# Altium PCB PCB2.PcbDoc
Units mil, origin at the board's own origin, x right, y up, seen from the top; angles counter-clockwise.
Board outline 1610 x 4670 mil, 2 copper layers (Top Layer, Bottom Layer); 14 components, 20 nets, 148 pads, 0 vias.
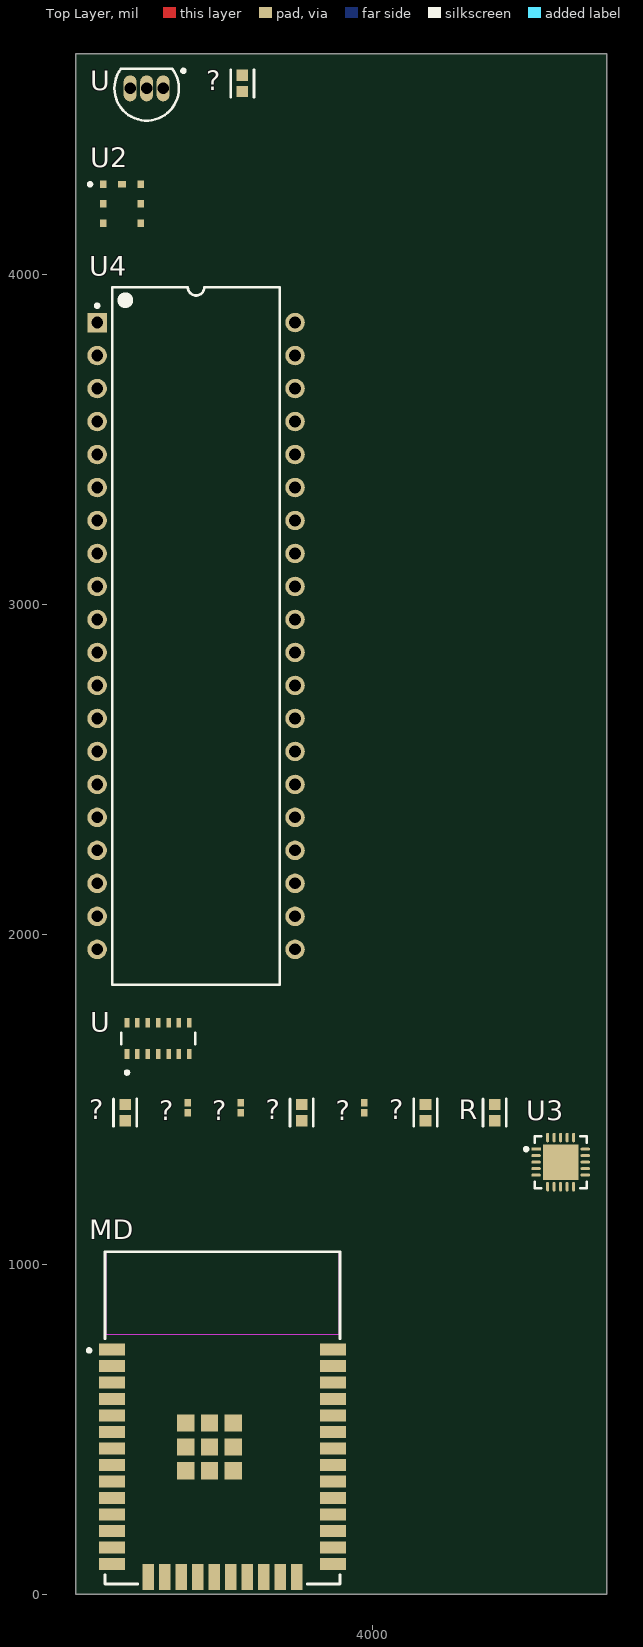
[diagram p0: Top Layer view]
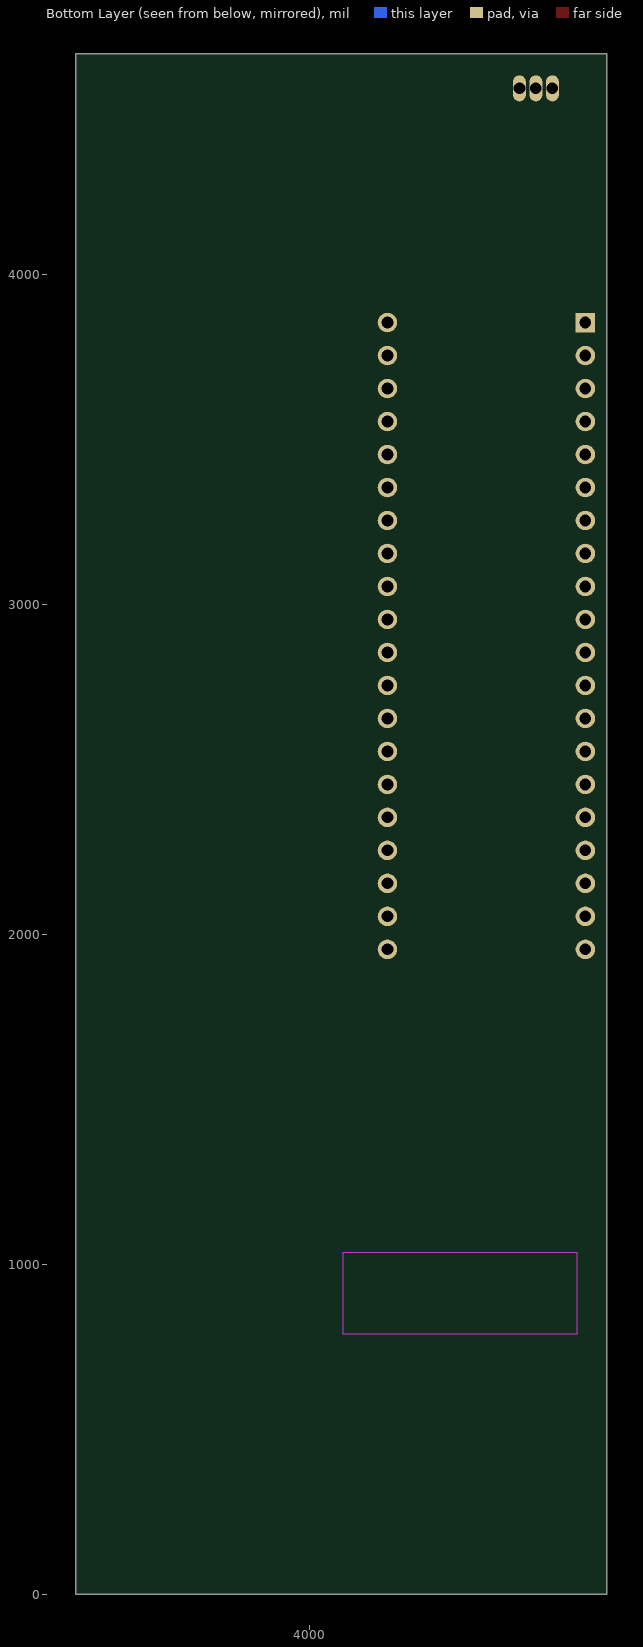
[diagram p1: Bottom Layer view, seen from below]

## Layer stack, top to bottom
Top Solder: solder mask 0.4, Solder Resist, Dk 3.5
Top Layer: signal copper 1.4
Dielectric 1: dielectric 12.6, FR-4, Dk 4.8
Bottom Layer: signal copper 1.4
Bottom Solder: solder mask 0.4, Solder Resist, Dk 3.5

## Board outline
3100,0 4710,0 4710,4670 3100,4670

## Design rules (kind name [scope] priority, off if disabled: settings)
Clearance [All] p1: gap=10 ignorepadtopadclearanceinfootprint=FALSE except(0: Arc-Hole Track-Hole SMDPad-Hole THPad-Hole Via-Hole Fill-Hole Poly-Hole Region-Hole Text-Hole)
PolygonConnect [All] p1: connectstyle=Relief reliefconductorwidth=10 reliefentries=4 polygonreliefangle="90 Angle" airgapwidth=10
RoomDefinition U_temp [InComponentClass('U_temp')] p1: confinementstyle=ConfineIn formatcopy=TRUE lockcomponents=FALSE outline 3125,1405 4205,1405 4205,4635 3125,4635
RoomDefinition U_pressiion [InComponentClass('U_pressiion')] p2: confinementstyle=ConfineIn formatcopy=TRUE lockcomponents=FALSE outline 3125,4125 3325,4125 3325,4405 3125,4405
RoomDefinition U_lcd [InComponentClass('U_lcd')] p3: confinementstyle=ConfineIn formatcopy=TRUE lockcomponents=FALSE outline 3125,1835 3805,1835 3805,4075 3125,4075
RoomDefinition U_heart_rate [InComponentClass('U_heart_rate')] p4: confinementstyle=ConfineIn formatcopy=TRUE lockcomponents=FALSE outline 3125,1565 3495,1565 3495,4635 3125,4635
RoomDefinition U_ecg [InComponentClass('U_ecg')] p5: confinementstyle=ConfineIn formatcopy=TRUE lockcomponents=FALSE outline 3125,1205 4675,1205 4675,4635 3125,4635
RoomDefinition ESP [InComponentClass('ESP')] p6: confinementstyle=ConfineIn formatcopy=TRUE lockcomponents=FALSE outline 3125,0 3935,0 3935,1155 3125,1155
RoutingVias [All] p1: holewidth=28 width=50 viastyle="Through Hole" minholewidth=28 minwidth=50 maxholewidth=28 maxwidth=50
SolderMaskExpansion [All] p1: expansion=4 istentingtop=FALSE
Width [All] p1: maxlimit=10 minlimit=10 preferedwidth=10
30 further rules are at their usual default settings.

## Components (designator, comment, footprint, x,y, rotation, side; value= is the part's Value field where it differs from the comment)
? "ERA3AEB302V" FP-ERA3A-IPC_C 3785,1460 r90 top
? "C0402C104K4RACTU" CAPC1005X55X30LL05T10 3975,1475 r90 top
? "C0402C104K4RACTU" CAPC1005X55X30LL05T10 3600,1475 r90 top
? "C0402C104K4RACTU" CAPC1005X55X30LL05T10 3440,1475 r90 top
? "ERA3AEB302V" FP-ERA3A-IPC_C 3250,1460 r90 top
? "ERA3AEB302V" FP-ERA3A-IPC_C 4160,1460 r90 top
? "ERA3AEB302V" FP-ERA3A-IPC_C 3605,4580 r90 top
MD "ESP32-WROOM-32D" FP-ESP32-WROOM-32D-MFG 3545,535 r0 top
R "ERA3AEB302V" FP-ERA3A-IPC_C 4370,1460 r90 top
U "MAX30102EFD+" FP-F143A5-1-MFG 3350,1685 r90 top
U "DS18B20+" Q3+1 3315,4565 r90 top
U2 "BMP180" BOSC-BMP180-7_V 3240,4215 r0 top
U3 "AD8232ACPZ-R7" FP-CP-20-8-IPC_C 4570,1310 r0 top
U4 "AY0438-I/P" PDIP600-P40 3465,2905 r0 top

## Footprints (in the part's own frame and the unit in brackets; to place one, negate y for a bottom-side part, rotate by r counter-clockwise, add the part's x,y. Pads: shape width x height; smd on the part's side, far side on the other; paste and mask are expansions set on the pad)
BOSC-BMP180-7_V [mm] "LGA, 7-Leads, Body 3.9x3.8mm, Pitch 1.5mm"
  rect 0.5x0.6 smd: 1(-1.45,1.5) 2(-1.45,0) 3(-1.45,-1.5) 4(1.45,-1.5) 5(1.45,0) 6(1.45,1.5)
  rect 0.6x0.5 smd: 7(0,1.5)
  silkscreen extent -2.57,1.38 -2.32,1.62, body extent -1.85,-1.95 1.85,1.95, height 1
CAPC1005X55X30LL05T10 [mm] "Chip Capacitor, 2-Leads, Body 1.00x0.50mm, IPC High Density"
  rect 0.56x0.52 smd: 1(-0.38,0) 2(0.38,0)
  body extent -0.53,-0.28 0.53,0.28, height 0.55
FP-CP-20-8-IPC_C [mm]
  rect 0.731x0.239 smd paste+0 mask+0: 1(-1.891,1)
  rrect100% 0.731x0.239 smd paste+0 mask+0: 2(-1.891,0.5) 3(-1.891,0) 4(-1.891,-0.5) 5(-1.891,-1) 11(1.891,-1) 12(1.891,-0.5) 13(1.891,0) 14(1.891,0.5) 15(1.891,1)
  rrect100% 0.239x0.731 smd paste+0 mask+0: 6(-1,-1.891) 7(-0.5,-1.891) 8(0,-1.891) 9(0.5,-1.891) 10(1,-1.891) 16(1,1.891) 17(0.5,1.891) 18(0,1.891) 19(-0.5,1.891) 20(-1,1.891)
  rect 2.75x2.75 smd paste-1000 mask+0: 21(0,0)
  silkscreen extent -2.78,-2 2,2, body extent -2.36,-2.36 2.36,2.36, height 0.25
FP-ERA3A-IPC_C [mil]
  rect 33.66x35.68 smd paste+0 mask+0: 1(-24.63,0) 2(24.63,0)
  silkscreen extent -41,-35 41,35, body extent -45,-24 45,24, height 10
FP-ESP32-WROOM-32D-MFG [mm]
  rect 2x0.9 smd paste+0 mask+0: 1(-8.5,5.26) 2(-8.5,3.99) 3(-8.5,2.72) 4(-8.5,1.45) 5(-8.5,0.18) 6(-8.5,-1.09) 7(-8.5,-2.36) 8(-8.5,-3.63) 9(-8.5,-4.9) 10(-8.5,-6.17) 11(-8.5,-7.44) 12(-8.5,-8.71) 13(-8.5,-9.98) 14(-8.5,-11.25) 25(8.5,-11.25) 26(8.5,-9.98) 27(8.5,-8.71) 28(8.5,-7.44) 29(8.5,-6.17) 30(8.5,-4.9) 31(8.5,-3.63) 32(8.5,-2.36) 33(8.5,-1.09) 34(8.5,0.18) 35(8.5,1.45) 36(8.5,2.72) 37(8.5,3.99) 38(8.5,5.26)
  rect 0.9x2 smd paste+0 mask+0: 15(-5.715,-12.25) 16(-4.445,-12.25) 17(-3.175,-12.25) 18(-1.905,-12.25) 19(-0.635,-12.25) 20(0.635,-12.25) 21(1.905,-12.25) 22(3.175,-12.25) 23(4.445,-12.25) 24(5.715,-12.25)
  rect 1.33x1.33 smd paste+0 mask+0: 39(-2.835,-4.075) 39(-2.835,-2.24) 39(-2.835,-0.405) 39(-1,-4.075) 39(-1,-2.24) 39(-1,-0.405) 39(0.835,-4.075) 39(0.835,-2.24) 39(0.835,-0.405)
  Keep-Out Layer region: -9,6.45 9,6.45 9,12.75 -9,12.75
  Keep-Out Layer region: -9,6.45 9,6.45 9,12.75 -9,12.75
  silkscreen extent -10.4,-12.8 9.05,12.8, body extent -9.6,-13.35 9.6,12.9, height 0.25
FP-F143A5-1-MFG [mm]
  rect 0.75x0.35 smd paste+0 mask+0: 1(-1.2,2.4) 2(-1.2,1.6) 3(-1.2,0.8) 4(-1.2,0) 5(-1.2,-0.8) 6(-1.2,-1.6) 7(-1.2,-2.4) 8(1.2,-2.4) 9(1.2,-1.6) 10(1.2,-0.8) 11(1.2,0) 12(1.2,0.8) 13(1.2,1.6) 14(1.2,2.4)
  silkscreen extent -2.75,-2.85 0.45,2.85, body extent -2.2,-3.35 2.2,3.35, height 0.25
PDIP600-P40 [mm] "DIP, 40-Pin, Row Spacing 15.24 mm, Pitch 2.54 mm"
  rect 1.5x1.5 hole 0.9: 1(-7.62,24.13)
  round 1.5 hole 0.9: 2(-7.62,21.59) 3(-7.62,19.05) 4(-7.62,16.51) 5(-7.62,13.97) 6(-7.62,11.43) 7(-7.62,8.89) 8(-7.62,6.35) 9(-7.62,3.81) 10(-7.62,1.27) 11(-7.62,-1.27) 12(-7.62,-3.81) 13(-7.62,-6.35) 14(-7.62,-8.89) 15(-7.62,-11.43) 16(-7.62,-13.97) 17(-7.62,-16.51) 18(-7.62,-19.05) 19(-7.62,-21.59) 20(-7.62,-24.13) 21(7.62,-24.13) 22(7.62,-21.59) 23(7.62,-19.05) 24(7.62,-16.51) 25(7.62,-13.97) 26(7.62,-11.43) 27(7.62,-8.89) 28(7.62,-6.35) 29(7.62,-3.81) 30(7.62,-1.27) 31(7.62,1.27) 32(7.62,3.81) 33(7.62,6.35) 34(7.62,8.89) 35(7.62,11.43) 36(7.62,13.97) 37(7.62,16.51) 38(7.62,19.05) 39(7.62,21.59) 40(7.62,24.13)
  silkscreen extent -7.74,-26.85 6.45,26.85, body extent -7.3,-26.85 7.3,26.85, height 6.35
Q3+1 [mm] "TO, Flat Index; 3 In-Line, Axial Leads; Body Dia. 4.7mm; Leads 0.56 x 0.51 mm (max)"
  oval 2x1 hole 0.9: 1(0,-1.27) 2(0,0) 3(0,1.27)
  silkscreen extent -2.48,-2.96 1.5,2.48, body extent -2.48,-2.5 1.5,2.5, height 4.96

## Part data
? ? ? R: library part CMP-2000-00026-2, "RES SMD 3K OHM 0.1% 1/10W 0603", Case Code (Imperial)=0603, Case Code (Metric)=1608, Max Operating Temperature=155°C, Max Power Dissipation=100mW, Min Operating Temperature=-55°C, Package Quantity=1, Resistance=3kR, Resistance Tolerance=0.1%, Resistor Type="Thin Film", Temperature Coefficient=25ppm/°C, Voltage Rating=75V, Case/Package=0603, Construction=Rectangular, Contact Plating=Tin, Depth=0.8mm, Features="Automotive AEC-Q200", Height=0.45mm, Lead Free="Lead Free", Length=1.6mm, Military Standard=Not, Mount="Surface Mount", Number of Pins=2, Number of Terminations=2, Packaging="Tape and Reel", Power Rating=100mW, Radiation Hardening=No, REACH SVHC="No SVHC", RoHS Compliant=Yes, Series=ERA-3A, Size Code=0603, Technology="THIN FILM", Termination=SMD/SMT, Voltage Rating (DC)=75V, Width=0.8mm
? ? ?: library part CMP-0001-00074-2, Manufacturer=Kemet, Part Number=C0402C104K4RACTU
?: library part CMP-2000-00026-2, "RES SMD 4.7K OHM 0.1% 1/10W 0603", Case Code (Imperial)=0603, Case Code (Metric)=1608, Max Operating Temperature=155°C, Max Power Dissipation=100mW, Min Operating Temperature=-55°C, Package Quantity=1, Resistance=3kR, Resistance Tolerance=0.1%, Resistor Type="Thin Film", Temperature Coefficient=25ppm/°C, Voltage Rating=75V, Case/Package=0603, Construction=Rectangular, Contact Plating=Tin, Depth=0.8mm, Features="Automotive AEC-Q200", Height=0.45mm, Lead Free="Lead Free", Length=1.6mm, Military Standard=Not, Mount="Surface Mount", Number of Pins=2, Number of Terminations=2, Packaging="Tape and Reel", Power Rating=100mW, Radiation Hardening=No, REACH SVHC="No SVHC", RoHS Compliant=Yes, Series=ERA-3A, Size Code=0603, Technology="THIN FILM", Termination=SMD/SMT, Voltage Rating (DC)=75V, Width=0.8mm
MD: library part CMP-194065-000003-1, "WIFI MODULE 32MBITS SPI FLASH", Manufacturer="Espressif Systems", Max Frequency=2484MHz, Max Supply Voltage=3.6V, Min Supply Voltage=3V, Nominal Supply Current=500mA, Temperature="-40°C to +85°C", Temperature Range High=+85°C, Temperature Range Low=-40°C, Automotive=No, Bandwidth=72MHz, Category=UNK, ComponentLink2Description=Datasheet, ComponentLink2URL=https://www.espressif.com/sites/default/files/documentation/esp32-wroom-32d_esp32-wroom-32u_datasheet_en.pdf, Data Rate=150Mbits/s, Device Class L1="Integrated Circuits (ICs)", Device Class L2="RF Semiconductors and Devices", Device Class L3=Transceivers, Digikey Description="WIFI MODULE 32MBITS SPI FLASH", Height=3.2mm, Interface=I2C,SPI,UART,Ethernet,I2S,Other, Lead Free=Yes, Manufacturer Part Number=ESP32-WROOM-32D, Mouser Description="Wi-Fi/BT BLE Module ESP32-D0WD, SPI Flash, UART, P", Number Of Adc Channels=16, Number Of Gpio=32, Octopart=https://octopart.com/esp32-wroom-32d-espressif+systems-91040050, Package=ESP32-WROOM-32D, RoHS=TRUE, Sensitivity=-98dBm
U: library part CMP-05738-000003-1, "IC SENSOR OXIMETER/HEARTRATE", Manufacturer="Maxim Integrated", Max Junction Temp=+90°C, Max Supply Voltage=2V, Min Supply Voltage=1.7V, Operating Supply Current=600uA, Package=F143A5-1, Temperature="-40°C to +85°C", Temperature Range High=+85°C, Temperature Range Low=-40°C, Automotive=No, Category=IC, ComponentLink2Description=Datasheet, ComponentLink2URL=https://datasheets.maximintegrated.com/en/ds/MAX30102.pdf, Device Class L1=Sensors, Device Class L2=unset, Device Class L3=unset, Digikey Description="IC SENSOR OXIMETER/HEARTRATE", Footprint Url=https://pdfserv.maximintegrated.com/land_patterns/90-0602.PDF, Height=1.65mm, Lead Free=Yes, Manufacturer Part Number=MAX30102EFD+, Mouser Description="Pulse Oximeter/Heart Rate Sensor, Oesip", Octopart=https://octopart.com/max30102efd%2B-maxim+integrated-59568799, RoHS=TRUE, Sensor Output=I2C
U: library part CMP-0253-00003-1, "Programmable Resolution Digital Thermometer, 1-Wire Interface, ±0.5°C Accuracy, 3-Pin TO92, -55°C to +125°C, Pb-Free", Code_JEDEC=TO-226-AA, ComponentLink1Description="Manufacturer URL", ComponentLink1URL=http://www.maxim-ic.com, ComponentLink2Description=Datasheet, ComponentLink2URL=http://datasheets.maxim-ic.com/en/ds/DS18B20.pdf, DatasheetVersion=2007, PackageDescription="TO-92 Package, Body Dia. 4.7mm; Leads 0.51 x 0.51 mm (max), Pb-Free", PackageReference=Q3+1, PackageVersion="revB, 2009"
U2: library part CMP-2000-05074-1, "Digital Pressure Sensor, 1.8 to 3.6 V, -40 to 85 degC, 7-Pin LGA, RoHS", Manufacturer="Bosch Sensortec", Operating Pressure=4.35PSI~15.95PSI(30kPa~110kPa), Operating Temperature=-40degC~85degC, Package / Case=7-VLGA, Standard Package=5,000, Supplier Device Package=7-LGA, Voltage - Supply=1.62V~3.6V, Accuracy=±2%, Category=Sensors,Transducers, Datasheet URL=http://media.digikey.com/pdf/Data%20Sheets/Bosch/BMP180.pdf, Datasheet Version="Rev. 2.4, 01/2012", EDA / CAD Models=DownloadfromAcceleratedDesigns, Family=PressureSensors,Transducers, For Use With="1528-1434-ND / -BMP180BAROMETRICPRESS/TEMP5V / 1528-1435-ND / -L3GD20HLSM303BMP18010DOFIMU / 1568-1260-ND / -SPARKFUNBAROMETRICPRESSURESEN / 1597-1301-ND / -GROVEBAROMETERSENSOR / 1597-1302-ND / -GROVEIMU10DOF / 1471-1581-ND / -10DOFCLICK / 101040003-ND / -XADOWBAROMETERBMP180V1.0 / 101040004-ND / -XADOW-IMU10DOF / 114990245-ND / -BOARDTPHPRESSURETEMPREV.4 / 828-1028-ND / -BMP180SHUTTLEBOARDFORDEVKIT / 103990031-ND / -TPHBOARDTHETEMPERATUREPRESSU", Manufacturer URL=http://www.bosch-sensortec.com, Maximum Pressure=145.04PSI(1000kPa), Other Names="0273.300.244-1NV / 828-1027-2", Output=16~19b, Output Type=I²C, Port Style=NoPort, Pressure Type=Absolute, Termination Style=PCB
U3: library part CMP-09085-000003-1, "IC ECG FRONT END 20LFCSP", Case/Package="LFCSP EP", Input Bias Current=50pA, Input Offset Voltage (Vos)=3mV, Max Operating Temperature=85°C, Max Supply Voltage=3.5V, Min Operating Temperature=-40°C, Min Supply Voltage=2V, Nominal Supply Current=170uA, Package Quantity=1500, Power Supply Rejection Ratio (PSRR)=90dB, Common Mode Rejection Ratio=80dB, Contact Plating=Tin, Lead Free="Contains Lead", Mount="Surface Mount", Number of Pins=20, Operating Supply Current=170uA, Packaging="Tape and Reel", REACH SVHC="No SVHC"
U4: library part CMP-0186-00013-2, "32-Segment CMOS LCD Driver, 40-Pin PDIP, Industrial Temperature", ComponentLink1Description="Manufacturer URL", ComponentLink1URL=http://www.microchip.com/, ComponentLink2Description=Datasheet, ComponentLink2URL=http://ww1.microchip.com/downloads/en/DeviceDoc/80438a.pdf, ComponentLink3Description="Package Specification", ComponentLink3URL=http://www.microchip.com/stellent/groups/techpub_sg/documents/packagingspec/en012702.pdf, DatasheetVersion="revA, Apr-2003", PackageDescription="40-Lead Plastic Dual In-Line (P) - 600 mil Body [PDIP]", PackageReference=PDIP600-P40, PackageVersion="revBB, Aug-2009", RevisionNote="URLs added."

## Nets (pads, with @x,y where several pads share a name; then routed paths per layer and width w, separated by ;. In a path a pad name is that pad's centre, name@x,y a point inside that pad or via, vN(x,y) a via of type N, cw(c..) or ccw(c..) an arc to the next point about the centre after c; other vN are vias at no path point)
3.3V: 
GND: 
Net?_1: 
Net?_2: 
NetMD_13: 
NetMD_16: 
NetMD_24: 
NetMD_36: 
NetMD_37: 
NetR_1: 
NetR_2: 
NetU4_28: 
NetU4_29: 
NetU4_32: 
NetU4_33: 
NetU4_37: 
NetU4_38: 
NetU4_39: 
VCC: 
VPU: 
pads on no net: ?.1 ?.2 MD.1 MD.2 MD.3 MD.4 MD.5 MD.6 MD.7 MD.8 MD.9 MD.10 MD.11 MD.12 MD.13 MD.14 MD.15 MD.16 MD.17 MD.18 MD.19 MD.20 MD.21 MD.22 MD.23 MD.24 MD.25 MD.26 MD.27 MD.28 MD.29 MD.30 MD.31 MD.32 MD.33 MD.34 MD.35 MD.36 MD.37 MD.38 MD.39 R.1 R.2 U2.1 U2.2 U2.3 U2.4 U2.5 U2.6 U2.7 U3.1 U3.2 U3.3 U3.4 U3.5 U3.6 U3.7 U3.8 U3.9 U3.10 U3.11 U3.12 U3.13 U3.14 U3.15 U3.16 U3.17 U3.18 U3.19 U3.20 U3.21 U4.1 U4.2 U4.3 U4.4 U4.5 U4.6 U4.7 U4.8 U4.9 U4.10 U4.11 U4.12 U4.13 U4.14 U4.15 U4.16 U4.17 U4.18 U4.19 U4.20 U4.21 U4.22 U4.23 U4.24 U4.25 U4.26 U4.27 U4.28 U4.29 U4.30 U4.31 U4.32 U4.33 U4.34 U4.35 U4.36 U4.37 U4.38 U4.39 U4.40 U.1 U.2 U.3 U.4 U.5 U.6 U.7 U.8 U.9 U.10 U.11 U.12 U.13 U.14